# EAGLE board 13725_Qwiic_Spectral_Sensor-AS726x-panel.v10 (EAGLE 7.1.0), part 1 of 6
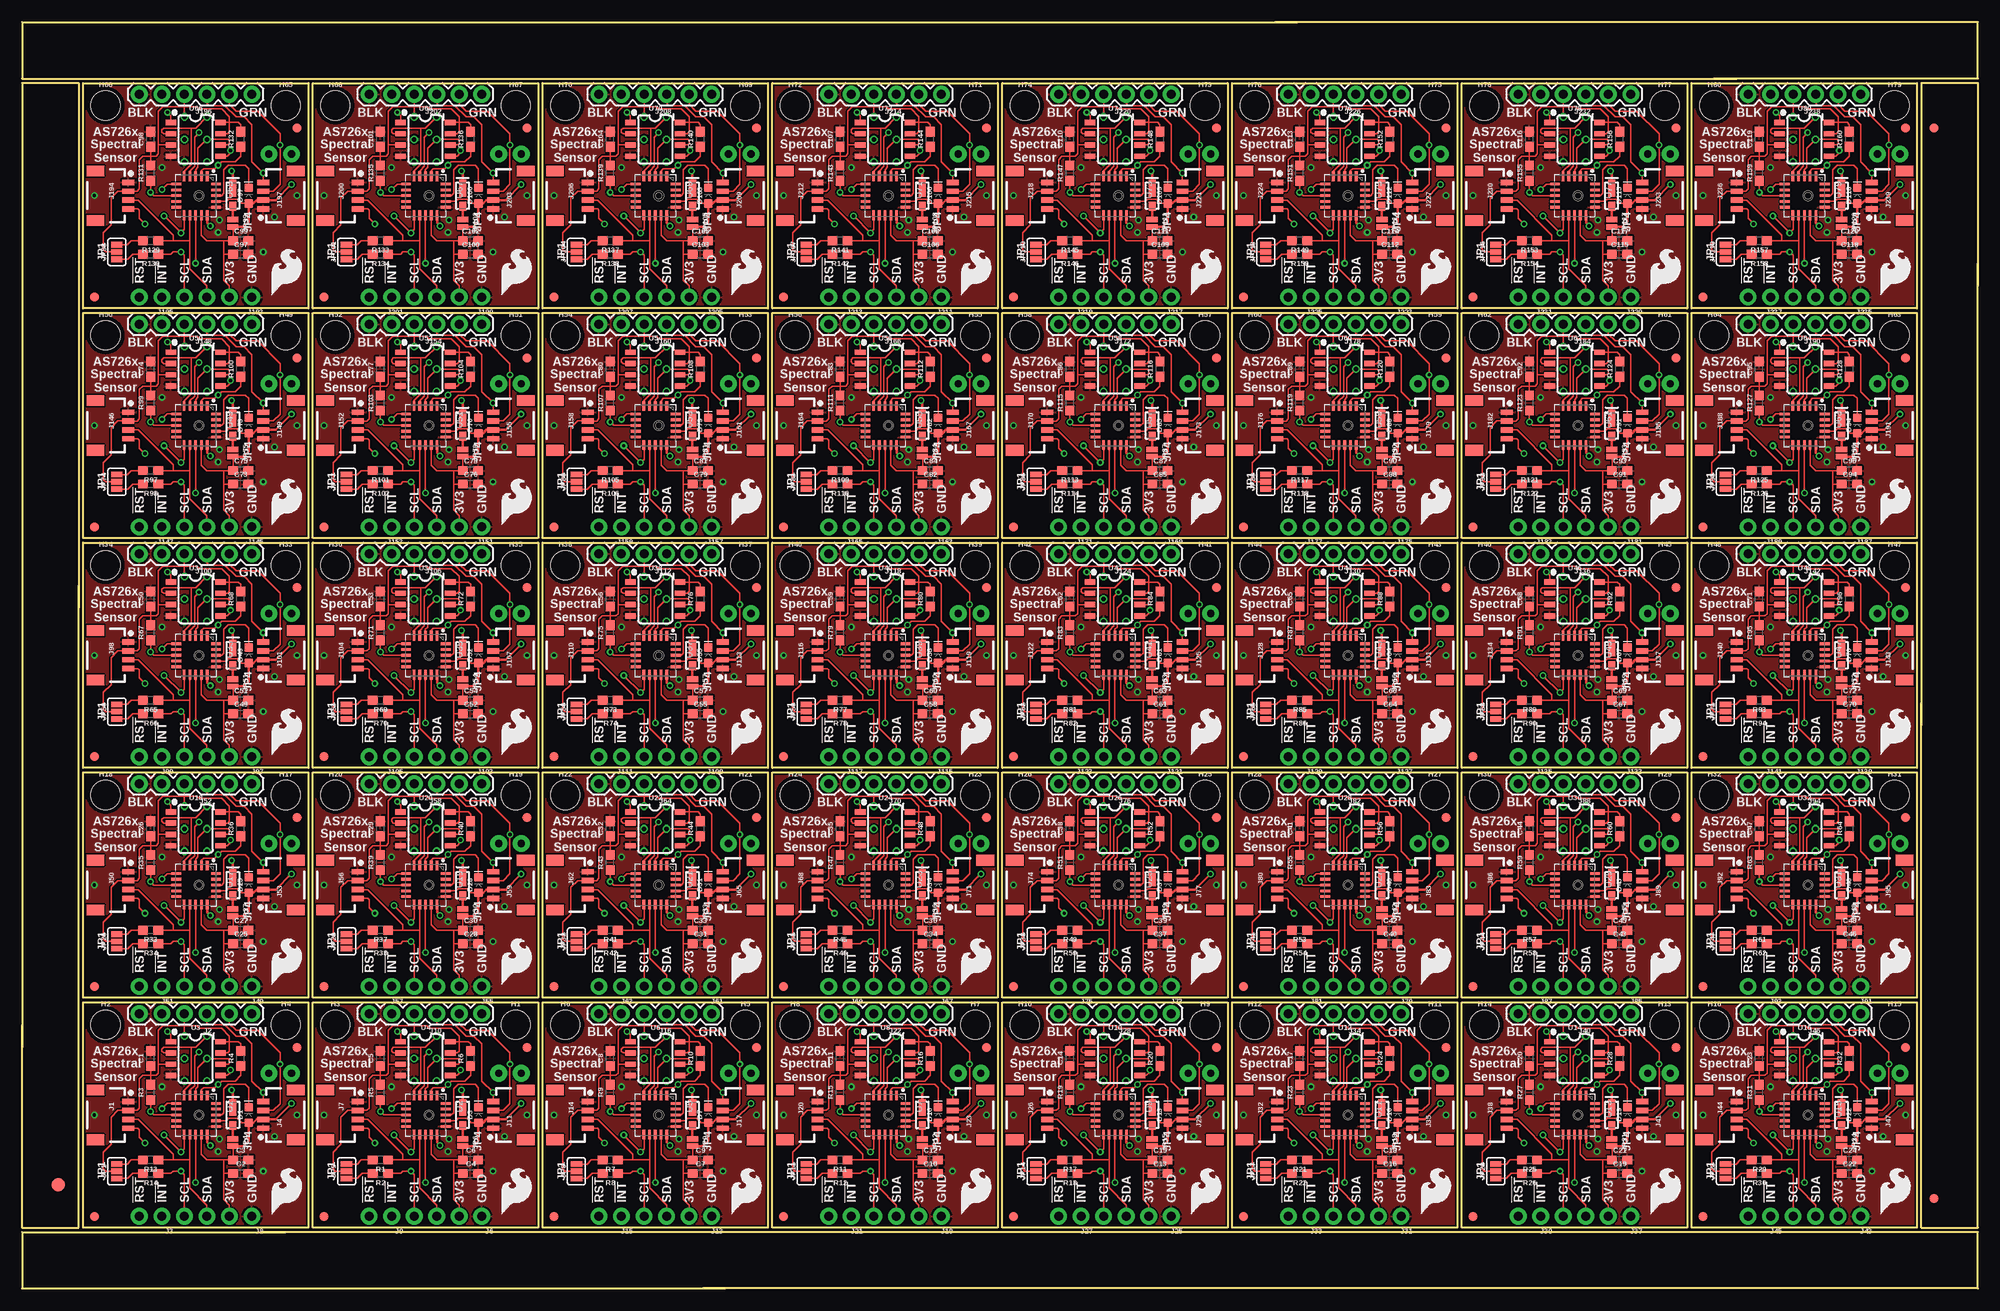
[diagram p0: board, top side]
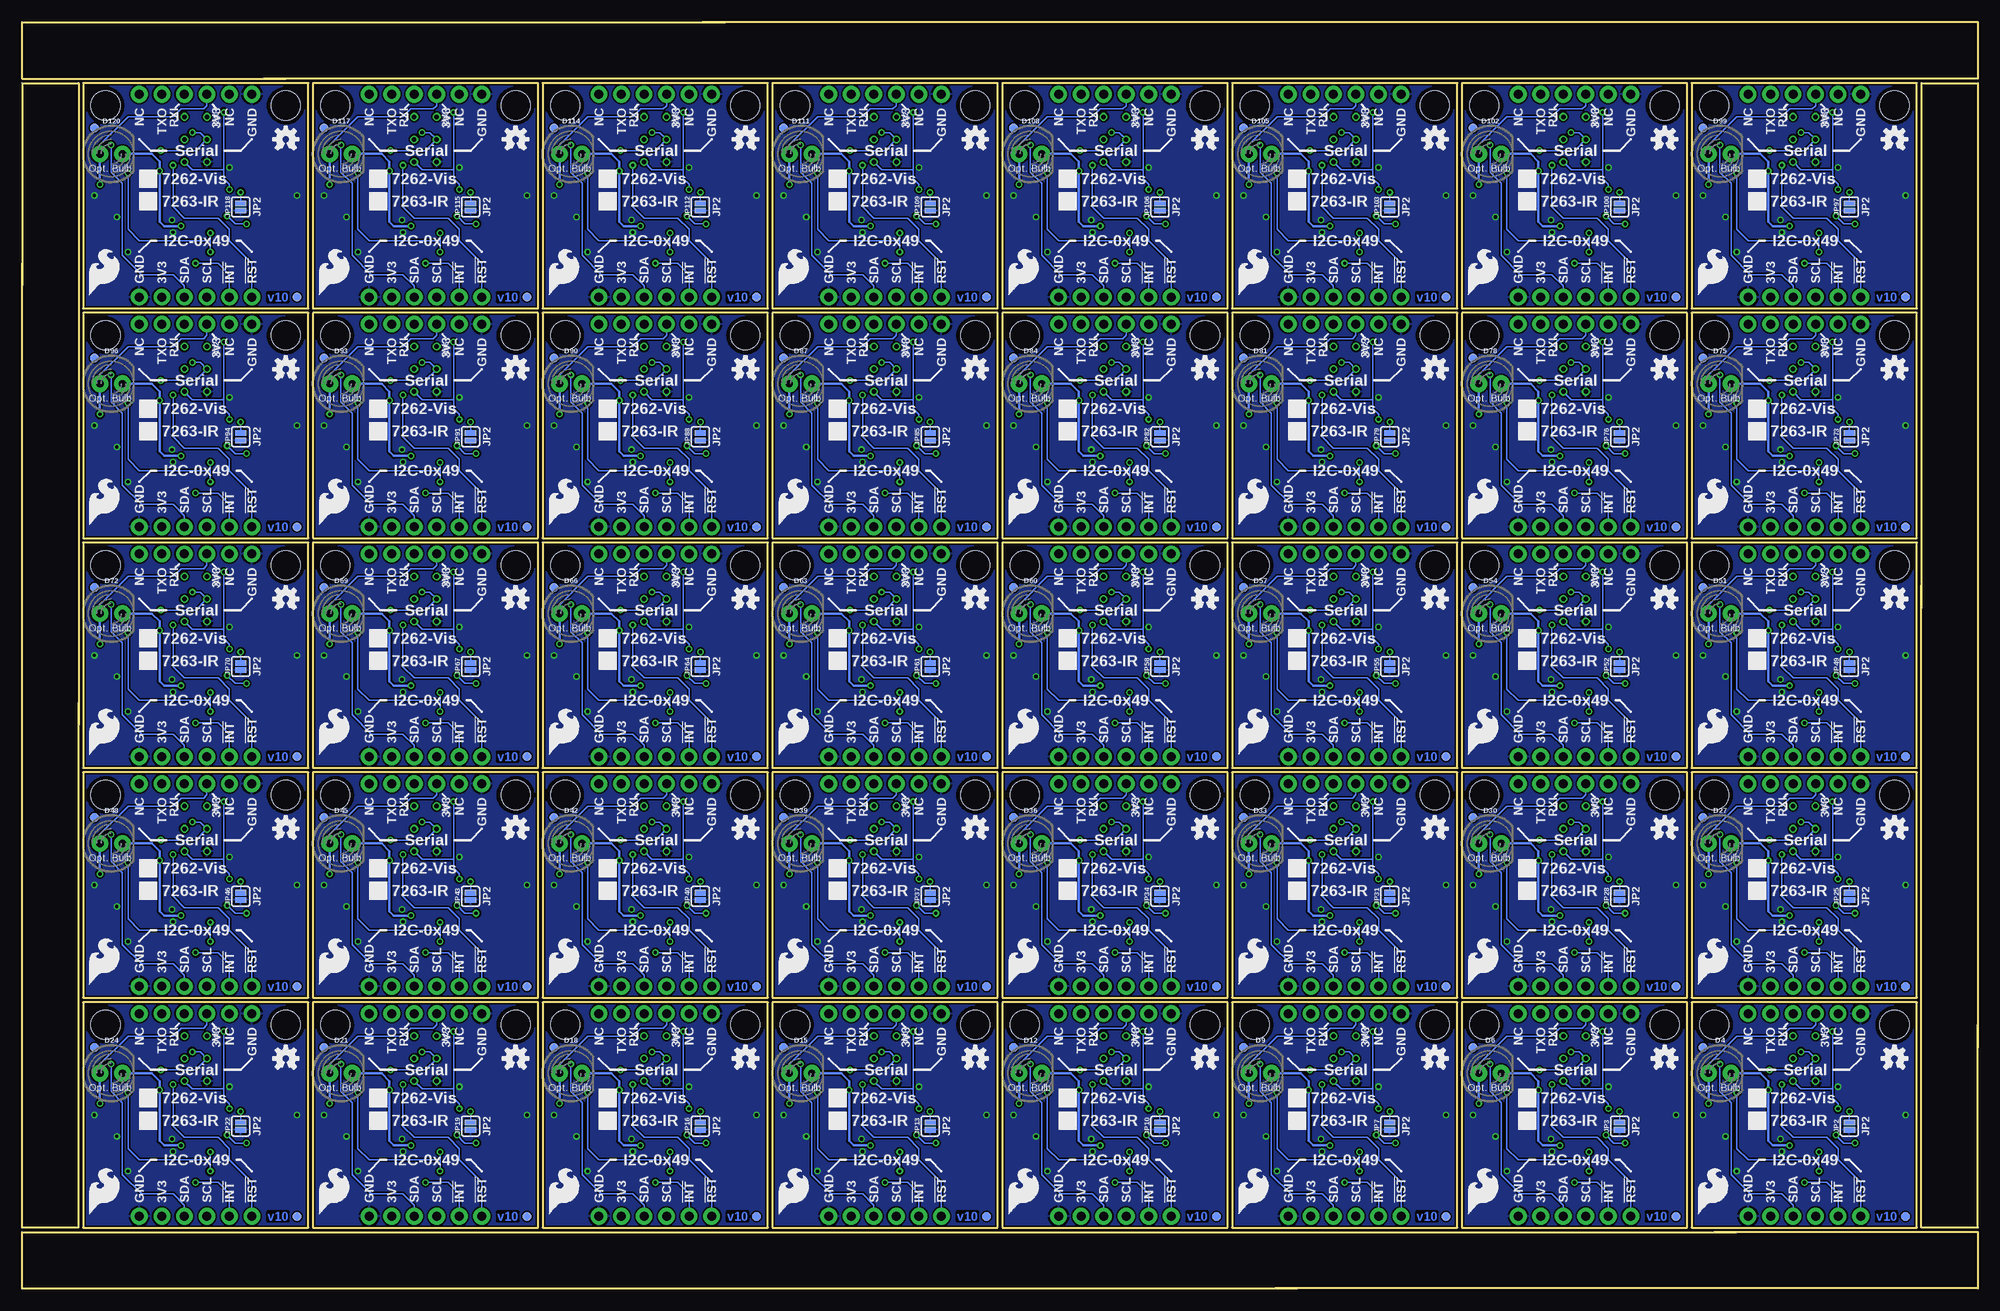
[diagram p1: board, bottom side, seen from below]

Size 220.47 x 142.75 mm. Coordinates in mm from the lower left corner, seen from the top.
Outline: 184 segments
Copper layers (1*16): Top 0.035mm / dielectric 1.5mm / Bottom 0.035mm
Design rules "SparkFun-2-layer-TIGHT": minimum track width 7mil, minimum drill 15mil, track to track 7mil, track to pad 7mil, pad to pad 7mil, via to via 7mil, smd to smd 7mil, copper to edge 7mil, drill to drill 7mil, minimum pad ring 7mil, minimum via ring 7mil, stop-mask expansion 4mil, vias tented up to drill 25mil, thermal gap 10mil

## Footprints (pad centres in the part's own frame; a part is rotated, then mirrored left to right if it is on the bottom)
0603 = smd 1.1 x 1: 1 -0.85,0; 2 0.85,0
LED-0603 = smd 1 x 1: A -0.877,0; C 0.877,0
SUPER_BRIGHT_SMD_LED_3014 = smd 1 x 0.8: A -1.2,0 | smd 1.9 x 0.8: C 0.827,0
LED_5MM_NOSILK = drill 0.813 pad 1.88: A -1.27,0; K 1.27,0
FIDUCIAL-1.5X3 = smd 1.5 x 1.5: 1 0,0
FIDUCIAL-1X2 = smd 1 x 1: 1 0,0
STAND-OFF = hole 3.302: 0,0
1X04_1MM_RA = smd 0.6 x 1.35: 1 -1.5,0; 2 -0.5,0; 3 0.5,0; 4 1.5,0 | smd 1.2 x 2: NC1 2.8,-3.675; NC2 -2.8,-3.675
FTDI_BASIC = drill 1.016 pad 1.88: CTS 10.16,0; DTR 0,0; GND 12.7,0; RXI 2.54,0; TXO 5.08,0; VCC 7.62,0
1X02_NO_SILK = drill 1.016 pad 1.88: 1 0,0; 2 2.54,0
2X3_TEST_POINTS = drill 0.508: 1 -2.54,-1.27; 2 -2.54,1.27; 3 0,-1.27; 4 0,1.27; 5 2.54,-1.27; 6 2.54,1.27
1X04_NO_SILK = drill 1.016 pad 1.88: 1 0,0; 2 2.54,0; 3 5.08,0; 4 7.62,0
SMT-JUMPER_3_2-NC_PASTE_SILK = smd 0.635 x 1.27: 1 -0.813,0; 2 0,0; 3 0.813,0
SMT-JUMPER_2_NO_SILK = smd 0.635 x 1.27: 1 -0.406,0; 2 0.406,0
SMT-JUMPER_2_NC_PASTE_NO-SILK = smd 0.635 x 1.27: 1 -0.406,0; 2 0.406,0
LGA20 = smd 1.1 x 0.3: 1 -2.2,1.3; 2 -2.2,0.65; 3 -2.2,0; 4 -2.2,-0.65; 5 -2.2,-1.3; 11 2.2,-1.3; 12 2.2,-0.65; 13 2.2,0; 14 2.2,0.65; 15 2.2,1.3 | smd 0.3 x 1.1: 6 -1.3,-2.2; 7 -0.65,-2.2; 8 0,-2.2; 9 0.65,-2.2; 10 1.3,-2.2; 16 1.3,2.3; 17 0.65,2.3; 18 0,2.3; 19 -0.65,2.3; 20 -1.3,2.3
SO08 = smd 0.6 x 1.2: 1 -1.905,-2.8; 2 -0.635,-2.8; 3 0.635,-2.8; 4 1.905,-2.8; 5 1.905,2.8; 6 0.635,2.8; 7 -0.635,2.8; 8 -1.905,2.8

## Placement (x,y rotation side)
C1  1.0uF  [0603]  14.48,25.91 90 top
C2  1.0uF  [0603]  24.64,12.95 0 top
C3  10uF  [0603]  24.64,14.48 0 top
C4  1.0uF  [0603]  50.55,12.95 0 top
C5  1.0uF  [0603]  40.39,25.91 90 top
C6  10uF  [0603]  50.55,14.48 0 top
C7  1.0uF  [0603]  76.45,12.95 0 top
C8  1.0uF  [0603]  66.29,25.91 90 top
C9  10uF  [0603]  76.45,14.48 0 top
C10  1.0uF  [0603]  102.36,12.95 0 top
C11  1.0uF  [0603]  92.2,25.91 90 top
C12  10uF  [0603]  102.36,14.48 0 top
C13  1.0uF  [0603]  128.27,12.95 0 top
C14  1.0uF  [0603]  118.11,25.91 90 top
C15  10uF  [0603]  128.27,14.48 0 top
C16  1.0uF  [0603]  154.18,12.95 0 top
C17  1.0uF  [0603]  144.02,25.91 90 top
C18  10uF  [0603]  154.18,14.48 0 top
C19  1.0uF  [0603]  180.09,12.95 0 top
C20  1.0uF  [0603]  169.93,25.91 90 top
C21  10uF  [0603]  180.09,14.48 0 top
C22  1.0uF  [0603]  205.99,12.95 0 top
C23  1.0uF  [0603]  195.83,25.91 90 top
C24  10uF  [0603]  205.99,14.48 0 top
C25  1.0uF  [0603]  24.64,38.86 0 top
C26  1.0uF  [0603]  14.48,51.82 90 top
C27  10uF  [0603]  24.64,40.39 0 top
C28  1.0uF  [0603]  50.55,38.86 0 top
C29  1.0uF  [0603]  40.39,51.82 90 top
C30  10uF  [0603]  50.55,40.39 0 top
C31  1.0uF  [0603]  76.45,38.86 0 top
C32  1.0uF  [0603]  66.29,51.82 90 top
C33  10uF  [0603]  76.45,40.39 0 top
C34  1.0uF  [0603]  102.36,38.86 0 top
C35  1.0uF  [0603]  92.2,51.82 90 top
C36  10uF  [0603]  102.36,40.39 0 top
C37  1.0uF  [0603]  128.27,38.86 0 top
C38  1.0uF  [0603]  118.11,51.82 90 top
C39  10uF  [0603]  128.27,40.39 0 top
C40  1.0uF  [0603]  154.18,38.86 0 top
C41  1.0uF  [0603]  144.02,51.82 90 top
C42  10uF  [0603]  154.18,40.39 0 top
C43  1.0uF  [0603]  180.09,38.86 0 top
C44  1.0uF  [0603]  169.93,51.82 90 top
C45  10uF  [0603]  180.09,40.39 0 top
C46  1.0uF  [0603]  205.99,38.86 0 top
C47  1.0uF  [0603]  195.83,51.82 90 top
C48  10uF  [0603]  205.99,40.39 0 top
C49  1.0uF  [0603]  24.64,64.77 0 top
C50  1.0uF  [0603]  14.48,77.72 90 top
C51  10uF  [0603]  24.64,66.29 0 top
C52  1.0uF  [0603]  50.55,64.77 0 top
C53  1.0uF  [0603]  40.39,77.72 90 top
C54  10uF  [0603]  50.55,66.29 0 top
C55  1.0uF  [0603]  76.45,64.77 0 top
C56  1.0uF  [0603]  66.29,77.72 90 top
C57  10uF  [0603]  76.45,66.29 0 top
C58  1.0uF  [0603]  102.36,64.77 0 top
C59  1.0uF  [0603]  92.2,77.72 90 top
C60  10uF  [0603]  102.36,66.29 0 top
C61  1.0uF  [0603]  128.27,64.77 0 top
C62  1.0uF  [0603]  118.11,77.72 90 top
C63  10uF  [0603]  128.27,66.29 0 top
C64  1.0uF  [0603]  154.18,64.77 0 top
C65  1.0uF  [0603]  144.02,77.72 90 top
C66  10uF  [0603]  154.18,66.29 0 top
C67  1.0uF  [0603]  180.09,64.77 0 top
C68  1.0uF  [0603]  169.93,77.72 90 top
C69  10uF  [0603]  180.09,66.29 0 top
C70  1.0uF  [0603]  205.99,64.77 0 top
C71  1.0uF  [0603]  195.83,77.72 90 top
C72  10uF  [0603]  205.99,66.29 0 top
C73  1.0uF  [0603]  24.64,90.68 0 top
C74  1.0uF  [0603]  14.48,103.63 90 top
C75  10uF  [0603]  24.64,92.2 0 top
C76  1.0uF  [0603]  50.55,90.68 0 top
C77  1.0uF  [0603]  40.39,103.63 90 top
C78  10uF  [0603]  50.55,92.2 0 top
C79  1.0uF  [0603]  76.45,90.68 0 top
C80  1.0uF  [0603]  66.29,103.63 90 top
C81  10uF  [0603]  76.45,92.2 0 top
C82  1.0uF  [0603]  102.36,90.68 0 top
C83  1.0uF  [0603]  92.2,103.63 90 top
C84  10uF  [0603]  102.36,92.2 0 top
C85  1.0uF  [0603]  128.27,90.68 0 top
C86  1.0uF  [0603]  118.11,103.63 90 top
C87  10uF  [0603]  128.27,92.2 0 top
C88  1.0uF  [0603]  154.18,90.68 0 top
C89  1.0uF  [0603]  144.02,103.63 90 top
C90  10uF  [0603]  154.18,92.2 0 top
C91  1.0uF  [0603]  180.09,90.68 0 top
C92  1.0uF  [0603]  169.93,103.63 90 top
C93  10uF  [0603]  180.09,92.2 0 top
C94  1.0uF  [0603]  205.99,90.68 0 top
C95  1.0uF  [0603]  195.83,103.63 90 top
C96  10uF  [0603]  205.99,92.2 0 top
C97  1.0uF  [0603]  24.64,116.59 0 top
C98  1.0uF  [0603]  14.48,129.54 90 top
C99  10uF  [0603]  24.64,118.11 0 top
C100  1.0uF  [0603]  50.55,116.59 0 top
C101  1.0uF  [0603]  40.39,129.54 90 top
C102  10uF  [0603]  50.55,118.11 0 top
C103  1.0uF  [0603]  76.45,116.59 0 top
C104  1.0uF  [0603]  66.29,129.54 90 top
C105  10uF  [0603]  76.45,118.11 0 top
C106  1.0uF  [0603]  102.36,116.59 0 top
C107  1.0uF  [0603]  92.2,129.54 90 top
C108  10uF  [0603]  102.36,118.11 0 top
C109  1.0uF  [0603]  128.27,116.59 0 top
C110  1.0uF  [0603]  118.11,129.54 90 top
C111  10uF  [0603]  128.27,118.11 0 top
C112  1.0uF  [0603]  154.18,116.59 0 top
C113  1.0uF  [0603]  144.02,129.54 90 top
C114  10uF  [0603]  154.18,118.11 0 top
C115  1.0uF  [0603]  180.09,116.59 0 top
C116  1.0uF  [0603]  169.93,129.54 90 top
C117  10uF  [0603]  180.09,118.11 0 top
C118  1.0uF  [0603]  205.99,116.59 0 top
C119  1.0uF  [0603]  195.83,129.54 90 top
C120  10uF  [0603]  205.99,118.11 0 top
D1  BLUE  [LED-0603]  25.53,19.56 90 top
D2  White, 60mA  [SUPER_BRIGHT_SMD_LED_3014]  23.75,19.56 90 top
D3  BLUE  [LED-0603]  51.44,19.56 90 top
D4  Incandescent  [LED_5MM_NOSILK]  29.08,24.26 0 bottom
D5  White, 60mA  [SUPER_BRIGHT_SMD_LED_3014]  49.66,19.56 90 top
D6  Incandescent  [LED_5MM_NOSILK]  54.99,24.26 0 bottom
D7  BLUE  [LED-0603]  77.34,19.56 90 top
D8  White, 60mA  [SUPER_BRIGHT_SMD_LED_3014]  75.56,19.56 90 top
D9  Incandescent  [LED_5MM_NOSILK]  80.9,24.26 0 bottom
D10  BLUE  [LED-0603]  103.25,19.56 90 top
D11  White, 60mA  [SUPER_BRIGHT_SMD_LED_3014]  101.47,19.56 90 top
D12  Incandescent  [LED_5MM_NOSILK]  106.81,24.26 0 bottom
D13  BLUE  [LED-0603]  129.16,19.56 90 top
D14  White, 60mA  [SUPER_BRIGHT_SMD_LED_3014]  127.38,19.56 90 top
D15  Incandescent  [LED_5MM_NOSILK]  132.72,24.26 0 bottom
D16  BLUE  [LED-0603]  155.07,19.56 90 top
D17  White, 60mA  [SUPER_BRIGHT_SMD_LED_3014]  153.29,19.56 90 top
D18  Incandescent  [LED_5MM_NOSILK]  158.62,24.26 0 bottom
D19  BLUE  [LED-0603]  180.97,19.56 90 top
D20  White, 60mA  [SUPER_BRIGHT_SMD_LED_3014]  179.2,19.56 90 top
D21  Incandescent  [LED_5MM_NOSILK]  184.53,24.26 0 bottom
D22  BLUE  [LED-0603]  206.88,19.56 90 top
D23  White, 60mA  [SUPER_BRIGHT_SMD_LED_3014]  205.1,19.56 90 top
D24  Incandescent  [LED_5MM_NOSILK]  210.44,24.26 0 bottom
D25  BLUE  [LED-0603]  25.53,45.47 90 top
D26  White, 60mA  [SUPER_BRIGHT_SMD_LED_3014]  23.75,45.47 90 top
D27  Incandescent  [LED_5MM_NOSILK]  29.08,50.16 0 bottom
D28  BLUE  [LED-0603]  51.44,45.47 90 top
D29  White, 60mA  [SUPER_BRIGHT_SMD_LED_3014]  49.66,45.47 90 top
D30  Incandescent  [LED_5MM_NOSILK]  54.99,50.16 0 bottom
D31  BLUE  [LED-0603]  77.34,45.47 90 top
D32  White, 60mA  [SUPER_BRIGHT_SMD_LED_3014]  75.56,45.47 90 top
D33  Incandescent  [LED_5MM_NOSILK]  80.9,50.16 0 bottom
D34  BLUE  [LED-0603]  103.25,45.47 90 top
D35  White, 60mA  [SUPER_BRIGHT_SMD_LED_3014]  101.47,45.47 90 top
D36  Incandescent  [LED_5MM_NOSILK]  106.81,50.16 0 bottom
D37  BLUE  [LED-0603]  129.16,45.47 90 top
D38  White, 60mA  [SUPER_BRIGHT_SMD_LED_3014]  127.38,45.47 90 top
D39  Incandescent  [LED_5MM_NOSILK]  132.72,50.16 0 bottom
D40  BLUE  [LED-0603]  155.07,45.47 90 top
D41  White, 60mA  [SUPER_BRIGHT_SMD_LED_3014]  153.29,45.47 90 top
D42  Incandescent  [LED_5MM_NOSILK]  158.62,50.16 0 bottom
D43  BLUE  [LED-0603]  180.97,45.47 90 top
D44  White, 60mA  [SUPER_BRIGHT_SMD_LED_3014]  179.2,45.47 90 top
D45  Incandescent  [LED_5MM_NOSILK]  184.53,50.16 0 bottom
D46  BLUE  [LED-0603]  206.88,45.47 90 top
D47  White, 60mA  [SUPER_BRIGHT_SMD_LED_3014]  205.1,45.47 90 top
D48  Incandescent  [LED_5MM_NOSILK]  210.44,50.16 0 bottom
D49  BLUE  [LED-0603]  25.53,71.37 90 top
D50  White, 60mA  [SUPER_BRIGHT_SMD_LED_3014]  23.75,71.37 90 top
D51  Incandescent  [LED_5MM_NOSILK]  29.08,76.07 0 bottom
D52  BLUE  [LED-0603]  51.44,71.37 90 top
D53  White, 60mA  [SUPER_BRIGHT_SMD_LED_3014]  49.66,71.37 90 top
D54  Incandescent  [LED_5MM_NOSILK]  54.99,76.07 0 bottom
D55  BLUE  [LED-0603]  77.34,71.37 90 top
D56  White, 60mA  [SUPER_BRIGHT_SMD_LED_3014]  75.56,71.37 90 top
D57  Incandescent  [LED_5MM_NOSILK]  80.9,76.07 0 bottom
D58  BLUE  [LED-0603]  103.25,71.37 90 top
D59  White, 60mA  [SUPER_BRIGHT_SMD_LED_3014]  101.47,71.37 90 top
D60  Incandescent  [LED_5MM_NOSILK]  106.81,76.07 0 bottom
D61  BLUE  [LED-0603]  129.16,71.37 90 top
D62  White, 60mA  [SUPER_BRIGHT_SMD_LED_3014]  127.38,71.37 90 top
D63  Incandescent  [LED_5MM_NOSILK]  132.72,76.07 0 bottom
D64  BLUE  [LED-0603]  155.07,71.37 90 top
D65  White, 60mA  [SUPER_BRIGHT_SMD_LED_3014]  153.29,71.37 90 top
D66  Incandescent  [LED_5MM_NOSILK]  158.62,76.07 0 bottom
D67  BLUE  [LED-0603]  180.97,71.37 90 top
D68  White, 60mA  [SUPER_BRIGHT_SMD_LED_3014]  179.2,71.37 90 top
D69  Incandescent  [LED_5MM_NOSILK]  184.53,76.07 0 bottom
D70  BLUE  [LED-0603]  206.88,71.37 90 top
D71  White, 60mA  [SUPER_BRIGHT_SMD_LED_3014]  205.1,71.37 90 top
D72  Incandescent  [LED_5MM_NOSILK]  210.44,76.07 0 bottom
D73  BLUE  [LED-0603]  25.53,97.28 90 top
D74  White, 60mA  [SUPER_BRIGHT_SMD_LED_3014]  23.75,97.28 90 top
D75  Incandescent  [LED_5MM_NOSILK]  29.08,101.98 0 bottom
D76  BLUE  [LED-0603]  51.44,97.28 90 top
D77  White, 60mA  [SUPER_BRIGHT_SMD_LED_3014]  49.66,97.28 90 top
D78  Incandescent  [LED_5MM_NOSILK]  54.99,101.98 0 bottom
D79  BLUE  [LED-0603]  77.34,97.28 90 top
D80  White, 60mA  [SUPER_BRIGHT_SMD_LED_3014]  75.56,97.28 90 top
D81  Incandescent  [LED_5MM_NOSILK]  80.9,101.98 0 bottom
D82  BLUE  [LED-0603]  103.25,97.28 90 top
D83  White, 60mA  [SUPER_BRIGHT_SMD_LED_3014]  101.47,97.28 90 top
D84  Incandescent  [LED_5MM_NOSILK]  106.81,101.98 0 bottom
D85  BLUE  [LED-0603]  129.16,97.28 90 top
D86  White, 60mA  [SUPER_BRIGHT_SMD_LED_3014]  127.38,97.28 90 top
D87  Incandescent  [LED_5MM_NOSILK]  132.72,101.98 0 bottom
D88  BLUE  [LED-0603]  155.07,97.28 90 top
D89  White, 60mA  [SUPER_BRIGHT_SMD_LED_3014]  153.29,97.28 90 top
D90  Incandescent  [LED_5MM_NOSILK]  158.62,101.98 0 bottom
D91  BLUE  [LED-0603]  180.97,97.28 90 top
D92  White, 60mA  [SUPER_BRIGHT_SMD_LED_3014]  179.2,97.28 90 top
D93  Incandescent  [LED_5MM_NOSILK]  184.53,101.98 0 bottom
D94  BLUE  [LED-0603]  206.88,97.28 90 top
D95  White, 60mA  [SUPER_BRIGHT_SMD_LED_3014]  205.1,97.28 90 top
D96  Incandescent  [LED_5MM_NOSILK]  210.44,101.98 0 bottom
D97  BLUE  [LED-0603]  25.53,123.19 90 top
D98  White, 60mA  [SUPER_BRIGHT_SMD_LED_3014]  23.75,123.19 90 top
D99  Incandescent  [LED_5MM_NOSILK]  29.08,127.89 0 bottom
D100  BLUE  [LED-0603]  51.44,123.19 90 top
D101  White, 60mA  [SUPER_BRIGHT_SMD_LED_3014]  49.66,123.19 90 top
D102  Incandescent  [LED_5MM_NOSILK]  54.99,127.89 0 bottom
D103  BLUE  [LED-0603]  77.34,123.19 90 top
D104  White, 60mA  [SUPER_BRIGHT_SMD_LED_3014]  75.56,123.19 90 top
D105  Incandescent  [LED_5MM_NOSILK]  80.9,127.89 0 bottom
D106  BLUE  [LED-0603]  103.25,123.19 90 top
D107  White, 60mA  [SUPER_BRIGHT_SMD_LED_3014]  101.47,123.19 90 top
D108  Incandescent  [LED_5MM_NOSILK]  106.81,127.89 0 bottom
D109  BLUE  [LED-0603]  129.16,123.19 90 top
D110  White, 60mA  [SUPER_BRIGHT_SMD_LED_3014]  127.38,123.19 90 top
D111  Incandescent  [LED_5MM_NOSILK]  132.72,127.89 0 bottom
D112  BLUE  [LED-0603]  155.07,123.19 90 top
D113  White, 60mA  [SUPER_BRIGHT_SMD_LED_3014]  153.29,123.19 90 top
D114  Incandescent  [LED_5MM_NOSILK]  158.62,127.89 0 bottom
D115  BLUE  [LED-0603]  180.97,123.19 90 top
D116  White, 60mA  [SUPER_BRIGHT_SMD_LED_3014]  179.2,123.19 90 top
D117  Incandescent  [LED_5MM_NOSILK]  184.53,127.89 0 bottom
D118  BLUE  [LED-0603]  206.88,123.19 90 top
D119  White, 60mA  [SUPER_BRIGHT_SMD_LED_3014]  205.1,123.19 90 top
D120  Incandescent  [LED_5MM_NOSILK]  210.44,127.89 0 bottom
E$1  [FIDUCIAL-1.5X3]  4.06,11.68 0 top
E$7  [FIDUCIAL-1X2]  215.52,130.81 180 top
E$8  [FIDUCIAL-1X2]  215.52,10.16 0 top
FD1  FIDUCIAL1X2  [FIDUCIAL-1X2]  8.13,8.13 0 top
FD2  FIDUCIAL1X2  [FIDUCIAL-1X2]  30.99,27.18 0 top
FD3  FIDUCIAL1X2  [FIDUCIAL-1X2]  8.13,8.13 0 bottom
FD4  FIDUCIAL1X2  [FIDUCIAL-1X2]  30.99,27.18 0 bottom
FD5  FIDUCIAL1X2  [FIDUCIAL-1X2]  34.04,8.13 0 top
FD6  FIDUCIAL1X2  [FIDUCIAL-1X2]  56.9,27.18 0 top
FD7  FIDUCIAL1X2  [FIDUCIAL-1X2]  34.04,8.13 0 bottom
FD8  FIDUCIAL1X2  [FIDUCIAL-1X2]  56.9,27.18 0 bottom
FD9  FIDUCIAL1X2  [FIDUCIAL-1X2]  59.94,8.13 0 top
FD10  FIDUCIAL1X2  [FIDUCIAL-1X2]  82.8,27.18 0 top
FD11  FIDUCIAL1X2  [FIDUCIAL-1X2]  59.94,8.13 0 bottom
FD12  FIDUCIAL1X2  [FIDUCIAL-1X2]  82.8,27.18 0 bottom
FD13  FIDUCIAL1X2  [FIDUCIAL-1X2]  85.85,8.13 0 top
FD14  FIDUCIAL1X2  [FIDUCIAL-1X2]  108.71,27.18 0 top
FD15  FIDUCIAL1X2  [FIDUCIAL-1X2]  85.85,8.13 0 bottom
FD16  FIDUCIAL1X2  [FIDUCIAL-1X2]  108.71,27.18 0 bottom
FD17  FIDUCIAL1X2  [FIDUCIAL-1X2]  111.76,8.13 0 top
FD18  FIDUCIAL1X2  [FIDUCIAL-1X2]  134.62,27.18 0 top
FD19  FIDUCIAL1X2  [FIDUCIAL-1X2]  111.76,8.13 0 bottom
FD20  FIDUCIAL1X2  [FIDUCIAL-1X2]  134.62,27.18 0 bottom
FD21  FIDUCIAL1X2  [FIDUCIAL-1X2]  137.67,8.13 0 top
FD22  FIDUCIAL1X2  [FIDUCIAL-1X2]  160.53,27.18 0 top
FD23  FIDUCIAL1X2  [FIDUCIAL-1X2]  137.67,8.13 0 bottom
FD24  FIDUCIAL1X2  [FIDUCIAL-1X2]  160.53,27.18 0 bottom
FD25  FIDUCIAL1X2  [FIDUCIAL-1X2]  163.58,8.13 0 top
FD26  FIDUCIAL1X2  [FIDUCIAL-1X2]  186.44,27.18 0 top
FD27  FIDUCIAL1X2  [FIDUCIAL-1X2]  163.58,8.13 0 bottom
FD28  FIDUCIAL1X2  [FIDUCIAL-1X2]  186.44,27.18 0 bottom
FD29  FIDUCIAL1X2  [FIDUCIAL-1X2]  189.48,8.13 0 top
FD30  FIDUCIAL1X2  [FIDUCIAL-1X2]  212.34,27.18 0 top
FD31  FIDUCIAL1X2  [FIDUCIAL-1X2]  189.48,8.13 0 bottom
FD32  FIDUCIAL1X2  [FIDUCIAL-1X2]  212.34,27.18 0 bottom
FD33  FIDUCIAL1X2  [FIDUCIAL-1X2]  8.13,34.04 0 top
FD34  FIDUCIAL1X2  [FIDUCIAL-1X2]  30.99,53.09 0 top
FD35  FIDUCIAL1X2  [FIDUCIAL-1X2]  8.13,34.04 0 bottom
FD36  FIDUCIAL1X2  [FIDUCIAL-1X2]  30.99,53.09 0 bottom
FD37  FIDUCIAL1X2  [FIDUCIAL-1X2]  34.04,34.04 0 top
FD38  FIDUCIAL1X2  [FIDUCIAL-1X2]  56.9,53.09 0 top
FD39  FIDUCIAL1X2  [FIDUCIAL-1X2]  34.04,34.04 0 bottom
FD40  FIDUCIAL1X2  [FIDUCIAL-1X2]  56.9,53.09 0 bottom
FD41  FIDUCIAL1X2  [FIDUCIAL-1X2]  59.94,34.04 0 top
FD42  FIDUCIAL1X2  [FIDUCIAL-1X2]  82.8,53.09 0 top
FD43  FIDUCIAL1X2  [FIDUCIAL-1X2]  59.94,34.04 0 bottom
FD44  FIDUCIAL1X2  [FIDUCIAL-1X2]  82.8,53.09 0 bottom
FD45  FIDUCIAL1X2  [FIDUCIAL-1X2]  85.85,34.04 0 top
FD46  FIDUCIAL1X2  [FIDUCIAL-1X2]  108.71,53.09 0 top
FD47  FIDUCIAL1X2  [FIDUCIAL-1X2]  85.85,34.04 0 bottom
FD48  FIDUCIAL1X2  [FIDUCIAL-1X2]  108.71,53.09 0 bottom
FD49  FIDUCIAL1X2  [FIDUCIAL-1X2]  111.76,34.04 0 top
FD50  FIDUCIAL1X2  [FIDUCIAL-1X2]  134.62,53.09 0 top
FD51  FIDUCIAL1X2  [FIDUCIAL-1X2]  111.76,34.04 0 bottom
FD52  FIDUCIAL1X2  [FIDUCIAL-1X2]  134.62,53.09 0 bottom
FD53  FIDUCIAL1X2  [FIDUCIAL-1X2]  137.67,34.04 0 top
FD54  FIDUCIAL1X2  [FIDUCIAL-1X2]  160.53,53.09 0 top
FD55  FIDUCIAL1X2  [FIDUCIAL-1X2]  137.67,34.04 0 bottom
FD56  FIDUCIAL1X2  [FIDUCIAL-1X2]  160.53,53.09 0 bottom
FD57  FIDUCIAL1X2  [FIDUCIAL-1X2]  163.58,34.04 0 top
FD58  FIDUCIAL1X2  [FIDUCIAL-1X2]  186.44,53.09 0 top
FD59  FIDUCIAL1X2  [FIDUCIAL-1X2]  163.58,34.04 0 bottom
FD60  FIDUCIAL1X2  [FIDUCIAL-1X2]  186.44,53.09 0 bottom
FD61  FIDUCIAL1X2  [FIDUCIAL-1X2]  189.48,34.04 0 top
FD62  FIDUCIAL1X2  [FIDUCIAL-1X2]  212.34,53.09 0 top
FD63  FIDUCIAL1X2  [FIDUCIAL-1X2]  189.48,34.04 0 bottom
FD64  FIDUCIAL1X2  [FIDUCIAL-1X2]  212.34,53.09 0 bottom
FD65  FIDUCIAL1X2  [FIDUCIAL-1X2]  8.13,59.94 0 top
FD66  FIDUCIAL1X2  [FIDUCIAL-1X2]  30.99,78.99 0 top
FD67  FIDUCIAL1X2  [FIDUCIAL-1X2]  8.13,59.94 0 bottom
FD68  FIDUCIAL1X2  [FIDUCIAL-1X2]  30.99,78.99 0 bottom
FD69  FIDUCIAL1X2  [FIDUCIAL-1X2]  34.04,59.94 0 top
FD70  FIDUCIAL1X2  [FIDUCIAL-1X2]  56.9,78.99 0 top
FD71  FIDUCIAL1X2  [FIDUCIAL-1X2]  34.04,59.94 0 bottom
FD72  FIDUCIAL1X2  [FIDUCIAL-1X2]  56.9,78.99 0 bottom
FD73  FIDUCIAL1X2  [FIDUCIAL-1X2]  59.94,59.94 0 top
FD74  FIDUCIAL1X2  [FIDUCIAL-1X2]  82.8,78.99 0 top
FD75  FIDUCIAL1X2  [FIDUCIAL-1X2]  59.94,59.94 0 bottom
FD76  FIDUCIAL1X2  [FIDUCIAL-1X2]  82.8,78.99 0 bottom
FD77  FIDUCIAL1X2  [FIDUCIAL-1X2]  85.85,59.94 0 top
FD78  FIDUCIAL1X2  [FIDUCIAL-1X2]  108.71,78.99 0 top
FD79  FIDUCIAL1X2  [FIDUCIAL-1X2]  85.85,59.94 0 bottom
FD80  FIDUCIAL1X2  [FIDUCIAL-1X2]  108.71,78.99 0 bottom
FD81  FIDUCIAL1X2  [FIDUCIAL-1X2]  111.76,59.94 0 top
FD82  FIDUCIAL1X2  [FIDUCIAL-1X2]  134.62,78.99 0 top
FD83  FIDUCIAL1X2  [FIDUCIAL-1X2]  111.76,59.94 0 bottom
FD84  FIDUCIAL1X2  [FIDUCIAL-1X2]  134.62,78.99 0 bottom
FD85  FIDUCIAL1X2  [FIDUCIAL-1X2]  137.67,59.94 0 top
FD86  FIDUCIAL1X2  [FIDUCIAL-1X2]  160.53,78.99 0 top
FD87  FIDUCIAL1X2  [FIDUCIAL-1X2]  137.67,59.94 0 bottom
FD88  FIDUCIAL1X2  [FIDUCIAL-1X2]  160.53,78.99 0 bottom
FD89  FIDUCIAL1X2  [FIDUCIAL-1X2]  163.58,59.94 0 top
FD90  FIDUCIAL1X2  [FIDUCIAL-1X2]  186.44,78.99 0 top
FD91  FIDUCIAL1X2  [FIDUCIAL-1X2]  163.58,59.94 0 bottom
FD92  FIDUCIAL1X2  [FIDUCIAL-1X2]  186.44,78.99 0 bottom
FD93  FIDUCIAL1X2  [FIDUCIAL-1X2]  189.48,59.94 0 top
FD94  FIDUCIAL1X2  [FIDUCIAL-1X2]  212.34,78.99 0 top
FD95  FIDUCIAL1X2  [FIDUCIAL-1X2]  189.48,59.94 0 bottom
FD96  FIDUCIAL1X2  [FIDUCIAL-1X2]  212.34,78.99 0 bottom
FD97  FIDUCIAL1X2  [FIDUCIAL-1X2]  8.13,85.85 0 top
FD98  FIDUCIAL1X2  [FIDUCIAL-1X2]  30.99,104.9 0 top
FD99  FIDUCIAL1X2  [FIDUCIAL-1X2]  8.13,85.85 0 bottom
FD100  FIDUCIAL1X2  [FIDUCIAL-1X2]  30.99,104.9 0 bottom
FD101  FIDUCIAL1X2  [FIDUCIAL-1X2]  34.04,85.85 0 top
FD102  FIDUCIAL1X2  [FIDUCIAL-1X2]  56.9,104.9 0 top
FD103  FIDUCIAL1X2  [FIDUCIAL-1X2]  34.04,85.85 0 bottom
FD104  FIDUCIAL1X2  [FIDUCIAL-1X2]  56.9,104.9 0 bottom
FD105  FIDUCIAL1X2  [FIDUCIAL-1X2]  59.94,85.85 0 top
FD106  FIDUCIAL1X2  [FIDUCIAL-1X2]  82.8,104.9 0 top
FD107  FIDUCIAL1X2  [FIDUCIAL-1X2]  59.94,85.85 0 bottom
FD108  FIDUCIAL1X2  [FIDUCIAL-1X2]  82.8,104.9 0 bottom
FD109  FIDUCIAL1X2  [FIDUCIAL-1X2]  85.85,85.85 0 top
FD110  FIDUCIAL1X2  [FIDUCIAL-1X2]  108.71,104.9 0 top
FD111  FIDUCIAL1X2  [FIDUCIAL-1X2]  85.85,85.85 0 bottom
FD112  FIDUCIAL1X2  [FIDUCIAL-1X2]  108.71,104.9 0 bottom
FD113  FIDUCIAL1X2  [FIDUCIAL-1X2]  111.76,85.85 0 top
FD114  FIDUCIAL1X2  [FIDUCIAL-1X2]  134.62,104.9 0 top
FD115  FIDUCIAL1X2  [FIDUCIAL-1X2]  111.76,85.85 0 bottom
FD116  FIDUCIAL1X2  [FIDUCIAL-1X2]  134.62,104.9 0 bottom
FD117  FIDUCIAL1X2  [FIDUCIAL-1X2]  137.67,85.85 0 top
FD118  FIDUCIAL1X2  [FIDUCIAL-1X2]  160.53,104.9 0 top
FD119  FIDUCIAL1X2  [FIDUCIAL-1X2]  137.67,85.85 0 bottom
FD120  FIDUCIAL1X2  [FIDUCIAL-1X2]  160.53,104.9 0 bottom
FD121  FIDUCIAL1X2  [FIDUCIAL-1X2]  163.58,85.85 0 top
FD122  FIDUCIAL1X2  [FIDUCIAL-1X2]  186.44,104.9 0 top
FD123  FIDUCIAL1X2  [FIDUCIAL-1X2]  163.58,85.85 0 bottom
FD124  FIDUCIAL1X2  [FIDUCIAL-1X2]  186.44,104.9 0 bottom
FD125  FIDUCIAL1X2  [FIDUCIAL-1X2]  189.48,85.85 0 top
FD126  FIDUCIAL1X2  [FIDUCIAL-1X2]  212.34,104.9 0 top
FD127  FIDUCIAL1X2  [FIDUCIAL-1X2]  189.48,85.85 0 bottom
FD128  FIDUCIAL1X2  [FIDUCIAL-1X2]  212.34,104.9 0 bottom
FD129  FIDUCIAL1X2  [FIDUCIAL-1X2]  8.13,111.76 0 top
FD130  FIDUCIAL1X2  [FIDUCIAL-1X2]  30.99,130.81 0 top
FD131  FIDUCIAL1X2  [FIDUCIAL-1X2]  8.13,111.76 0 bottom
FD132  FIDUCIAL1X2  [FIDUCIAL-1X2]  30.99,130.81 0 bottom
FD133  FIDUCIAL1X2  [FIDUCIAL-1X2]  34.04,111.76 0 top
FD134  FIDUCIAL1X2  [FIDUCIAL-1X2]  56.9,130.81 0 top
FD135  FIDUCIAL1X2  [FIDUCIAL-1X2]  34.04,111.76 0 bottom
FD136  FIDUCIAL1X2  [FIDUCIAL-1X2]  56.9,130.81 0 bottom
FD137  FIDUCIAL1X2  [FIDUCIAL-1X2]  59.94,111.76 0 top
FD138  FIDUCIAL1X2  [FIDUCIAL-1X2]  82.8,130.81 0 top
FD139  FIDUCIAL1X2  [FIDUCIAL-1X2]  59.94,111.76 0 bottom
FD140  FIDUCIAL1X2  [FIDUCIAL-1X2]  82.8,130.81 0 bottom
FD141  FIDUCIAL1X2  [FIDUCIAL-1X2]  85.85,111.76 0 top
FD142  FIDUCIAL1X2  [FIDUCIAL-1X2]  108.71,130.81 0 top
FD143  FIDUCIAL1X2  [FIDUCIAL-1X2]  85.85,111.76 0 bottom
FD144  FIDUCIAL1X2  [FIDUCIAL-1X2]  108.71,130.81 0 bottom
FD145  FIDUCIAL1X2  [FIDUCIAL-1X2]  111.76,111.76 0 top
FD146  FIDUCIAL1X2  [FIDUCIAL-1X2]  134.62,130.81 0 top
FD147  FIDUCIAL1X2  [FIDUCIAL-1X2]  111.76,111.76 0 bottom
FD148  FIDUCIAL1X2  [FIDUCIAL-1X2]  134.62,130.81 0 bottom
FD149  FIDUCIAL1X2  [FIDUCIAL-1X2]  137.67,111.76 0 top
FD150  FIDUCIAL1X2  [FIDUCIAL-1X2]  160.53,130.81 0 top
FD151  FIDUCIAL1X2  [FIDUCIAL-1X2]  137.67,111.76 0 bottom
FD152  FIDUCIAL1X2  [FIDUCIAL-1X2]  160.53,130.81 0 bottom
FD153  FIDUCIAL1X2  [FIDUCIAL-1X2]  163.58,111.76 0 top
FD154  FIDUCIAL1X2  [FIDUCIAL-1X2]  186.44,130.81 0 top
FD155  FIDUCIAL1X2  [FIDUCIAL-1X2]  163.58,111.76 0 bottom
FD156  FIDUCIAL1X2  [FIDUCIAL-1X2]  186.44,130.81 0 bottom
FD157  FIDUCIAL1X2  [FIDUCIAL-1X2]  189.48,111.76 0 top
FD158  FIDUCIAL1X2  [FIDUCIAL-1X2]  212.34,130.81 0 top
FD159  FIDUCIAL1X2  [FIDUCIAL-1X2]  189.48,111.76 0 bottom
FD160  FIDUCIAL1X2  [FIDUCIAL-1X2]  212.34,130.81 0 bottom
H1  STAND-OFF  [STAND-OFF]  55.63,29.72 0 top
H2  STAND-OFF  [STAND-OFF]  9.4,29.72 0 top
H3  STAND-OFF  [STAND-OFF]  35.31,29.72 0 top
H4  STAND-OFF  [STAND-OFF]  29.72,29.72 0 top
H5  STAND-OFF  [STAND-OFF]  81.53,29.72 0 top
H6  STAND-OFF  [STAND-OFF]  61.21,29.72 0 top
H7  STAND-OFF  [STAND-OFF]  107.44,29.72 0 top
H8  STAND-OFF  [STAND-OFF]  87.12,29.72 0 top
H9  STAND-OFF  [STAND-OFF]  133.35,29.72 0 top
H10  STAND-OFF  [STAND-OFF]  113.03,29.72 0 top
H11  STAND-OFF  [STAND-OFF]  159.26,29.72 0 top
H12  STAND-OFF  [STAND-OFF]  138.94,29.72 0 top
H13  STAND-OFF  [STAND-OFF]  185.17,29.72 0 top
H14  STAND-OFF  [STAND-OFF]  164.85,29.72 0 top
H15  STAND-OFF  [STAND-OFF]  211.07,29.72 0 top
H16  STAND-OFF  [STAND-OFF]  190.75,29.72 0 top
H17  STAND-OFF  [STAND-OFF]  29.72,55.63 0 top
H18  STAND-OFF  [STAND-OFF]  9.4,55.63 0 top
H19  STAND-OFF  [STAND-OFF]  55.63,55.63 0 top
H20  STAND-OFF  [STAND-OFF]  35.31,55.63 0 top
H21  STAND-OFF  [STAND-OFF]  81.53,55.63 0 top
H22  STAND-OFF  [STAND-OFF]  61.21,55.63 0 top
H23  STAND-OFF  [STAND-OFF]  107.44,55.63 0 top
H24  STAND-OFF  [STAND-OFF]  87.12,55.63 0 top
H25  STAND-OFF  [STAND-OFF]  133.35,55.63 0 top
H26  STAND-OFF  [STAND-OFF]  113.03,55.63 0 top
H27  STAND-OFF  [STAND-OFF]  159.26,55.63 0 top
H28  STAND-OFF  [STAND-OFF]  138.94,55.63 0 top
H29  STAND-OFF  [STAND-OFF]  185.17,55.63 0 top
H30  STAND-OFF  [STAND-OFF]  164.85,55.63 0 top
H31  STAND-OFF  [STAND-OFF]  211.07,55.63 0 top
H32  STAND-OFF  [STAND-OFF]  190.75,55.63 0 top
H33  STAND-OFF  [STAND-OFF]  29.72,81.53 0 top
H34  STAND-OFF  [STAND-OFF]  9.4,81.53 0 top
H35  STAND-OFF  [STAND-OFF]  55.63,81.53 0 top
H36  STAND-OFF  [STAND-OFF]  35.31,81.53 0 top
H37  STAND-OFF  [STAND-OFF]  81.53,81.53 0 top
H38  STAND-OFF  [STAND-OFF]  61.21,81.53 0 top
H39  STAND-OFF  [STAND-OFF]  107.44,81.53 0 top
H40  STAND-OFF  [STAND-OFF]  87.12,81.53 0 top
H41  STAND-OFF  [STAND-OFF]  133.35,81.53 0 top
H42  STAND-OFF  [STAND-OFF]  113.03,81.53 0 top
H43  STAND-OFF  [STAND-OFF]  159.26,81.53 0 top
H44  STAND-OFF  [STAND-OFF]  138.94,81.53 0 top
H45  STAND-OFF  [STAND-OFF]  185.17,81.53 0 top
H46  STAND-OFF  [STAND-OFF]  164.85,81.53 0 top
H47  STAND-OFF  [STAND-OFF]  211.07,81.53 0 top
H48  STAND-OFF  [STAND-OFF]  190.75,81.53 0 top
H49  STAND-OFF  [STAND-OFF]  29.72,107.44 0 top
H50  STAND-OFF  [STAND-OFF]  9.4,107.44 0 top
H51  STAND-OFF  [STAND-OFF]  55.63,107.44 0 top
H52  STAND-OFF  [STAND-OFF]  35.31,107.44 0 top
H53  STAND-OFF  [STAND-OFF]  81.53,107.44 0 top
H54  STAND-OFF  [STAND-OFF]  61.21,107.44 0 top
H55  STAND-OFF  [STAND-OFF]  107.44,107.44 0 top
H56  STAND-OFF  [STAND-OFF]  87.12,107.44 0 top
H57  STAND-OFF  [STAND-OFF]  133.35,107.44 0 top
H58  STAND-OFF  [STAND-OFF]  113.03,107.44 0 top
H59  STAND-OFF  [STAND-OFF]  159.26,107.44 0 top
H60  STAND-OFF  [STAND-OFF]  138.94,107.44 0 top
H61  STAND-OFF  [STAND-OFF]  185.17,107.44 0 top
H62  STAND-OFF  [STAND-OFF]  164.85,107.44 0 top
H63  STAND-OFF  [STAND-OFF]  211.07,107.44 0 top
H64  STAND-OFF  [STAND-OFF]  190.75,107.44 0 top
H65  STAND-OFF  [STAND-OFF]  29.72,133.35 0 top
H66  STAND-OFF  [STAND-OFF]  9.4,133.35 0 top
H67  STAND-OFF  [STAND-OFF]  55.63,133.35 0 top
H68  STAND-OFF  [STAND-OFF]  35.31,133.35 0 top
H69  STAND-OFF  [STAND-OFF]  81.53,133.35 0 top
H70  STAND-OFF  [STAND-OFF]  61.21,133.35 0 top
H71  STAND-OFF  [STAND-OFF]  107.44,133.35 0 top
H72  STAND-OFF  [STAND-OFF]  87.12,133.35 0 top
H73  STAND-OFF  [STAND-OFF]  133.35,133.35 0 top
H74  STAND-OFF  [STAND-OFF]  113.03,133.35 0 top
H75  STAND-OFF  [STAND-OFF]  159.26,133.35 0 top
H76  STAND-OFF  [STAND-OFF]  138.94,133.35 0 top
H77  STAND-OFF  [STAND-OFF]  185.17,133.35 0 top
H78  STAND-OFF  [STAND-OFF]  164.85,133.35 0 top
H79  STAND-OFF  [STAND-OFF]  211.07,133.35 0 top
H80  STAND-OFF  [STAND-OFF]  190.75,133.35 0 top
J1  Qwiic Right Angle  [1X04_1MM_RA]  11.94,19.56 270 top
J2  Serial Interface  [FTDI_BASIC]  25.91,30.99 180 top
J3  [1X02_NO_SILK]  15.75,8.13 180 top
J4  Qwiic Right Angle  [1X04_1MM_RA]  27.18,19.56 90 top
J5  Flash Programming  [2X3_TEST_POINTS]  19.56,25.91 270 bottom
J6  [1X04_NO_SILK]  51.82,8.13 180 top
J7  Qwiic Right Angle  [1X04_1MM_RA]  37.85,19.56 270 top
J8  [1X04_NO_SILK]  25.91,8.13 180 top
J9  [1X02_NO_SILK]  41.66,8.13 180 top
J10  Serial Interface  [FTDI_BASIC]  51.82,30.99 180 top
J11  Qwiic Right Angle  [1X04_1MM_RA]  53.09,19.56 90 top
J12  Flash Programming  [2X3_TEST_POINTS]  45.47,25.91 270 bottom
J13  [1X04_NO_SILK]  77.72,8.13 180 top
J14  Qwiic Right Angle  [1X04_1MM_RA]  63.75,19.56 270 top
J15  [1X02_NO_SILK]  67.56,8.13 180 top
J16  Serial Interface  [FTDI_BASIC]  77.72,30.99 180 top
J17  Qwiic Right Angle  [1X04_1MM_RA]  78.99,19.56 90 top
J18  Flash Programming  [2X3_TEST_POINTS]  71.37,25.91 270 bottom
J19  [1X04_NO_SILK]  103.63,8.13 180 top
J20  Qwiic Right Angle  [1X04_1MM_RA]  89.66,19.56 270 top
J21  [1X02_NO_SILK]  93.47,8.13 180 top
J22  Serial Interface  [FTDI_BASIC]  103.63,30.99 180 top
J23  Qwiic Right Angle  [1X04_1MM_RA]  104.9,19.56 90 top
J24  Flash Programming  [2X3_TEST_POINTS]  97.28,25.91 270 bottom
J25  [1X04_NO_SILK]  129.54,8.13 180 top
J26  Qwiic Right Angle  [1X04_1MM_RA]  115.57,19.56 270 top
J27  [1X02_NO_SILK]  119.38,8.13 180 top
J28  Serial Interface  [FTDI_BASIC]  129.54,30.99 180 top
J29  Qwiic Right Angle  [1X04_1MM_RA]  130.81,19.56 90 top
J30  Flash Programming  [2X3_TEST_POINTS]  123.19,25.91 270 bottom
J31  [1X04_NO_SILK]  155.45,8.13 180 top
J32  Qwiic Right Angle  [1X04_1MM_RA]  141.48,19.56 270 top
J33  [1X02_NO_SILK]  145.29,8.13 180 top
J34  Serial Interface  [FTDI_BASIC]  155.45,30.99 180 top
J35  Qwiic Right Angle  [1X04_1MM_RA]  156.72,19.56 90 top
J36  Flash Programming  [2X3_TEST_POINTS]  149.1,25.91 270 bottom
J37  [1X04_NO_SILK]  181.36,8.13 180 top
J38  Qwiic Right Angle  [1X04_1MM_RA]  167.39,19.56 270 top
J39  [1X02_NO_SILK]  171.2,8.13 180 top
J40  Serial Interface  [FTDI_BASIC]  181.36,30.99 180 top
J41  Qwiic Right Angle  [1X04_1MM_RA]  182.63,19.56 90 top
J42  Flash Programming  [2X3_TEST_POINTS]  175.01,25.91 270 bottom
J43  [1X04_NO_SILK]  207.26,8.13 180 top
J44  Qwiic Right Angle  [1X04_1MM_RA]  193.29,19.56 270 top
J45  [1X02_NO_SILK]  197.1,8.13 180 top
J46  Serial Interface  [FTDI_BASIC]  207.26,30.99 180 top
J47  Qwiic Right Angle  [1X04_1MM_RA]  208.53,19.56 90 top
J48  Flash Programming  [2X3_TEST_POINTS]  200.91,25.91 270 bottom
J49  [1X04_NO_SILK]  25.91,34.04 180 top
J50  Qwiic Right Angle  [1X04_1MM_RA]  11.94,45.47 270 top
J51  [1X02_NO_SILK]  15.75,34.04 180 top
J52  Serial Interface  [FTDI_BASIC]  25.91,56.9 180 top
J53  Qwiic Right Angle  [1X04_1MM_RA]  27.18,45.47 90 top
J54  Flash Programming  [2X3_TEST_POINTS]  19.56,51.82 270 bottom
J55  [1X04_NO_SILK]  51.82,34.04 180 top
J56  Qwiic Right Angle  [1X04_1MM_RA]  37.85,45.47 270 top
J57  [1X02_NO_SILK]  41.66,34.04 180 top
J58  Serial Interface  [FTDI_BASIC]  51.82,56.9 180 top
J59  Qwiic Right Angle  [1X04_1MM_RA]  53.09,45.47 90 top
J60  Flash Programming  [2X3_TEST_POINTS]  45.47,51.82 270 bottom
J61  [1X04_NO_SILK]  77.72,34.04 180 top
J62  Qwiic Right Angle  [1X04_1MM_RA]  63.75,45.47 270 top
J63  [1X02_NO_SILK]  67.56,34.04 180 top
J64  Serial Interface  [FTDI_BASIC]  77.72,56.9 180 top
J65  Qwiic Right Angle  [1X04_1MM_RA]  78.99,45.47 90 top
J66  Flash Programming  [2X3_TEST_POINTS]  71.37,51.82 270 bottom
J67  [1X04_NO_SILK]  103.63,34.04 180 top
J68  Qwiic Right Angle  [1X04_1MM_RA]  89.66,45.47 270 top
J69  [1X02_NO_SILK]  93.47,34.04 180 top
J70  Serial Interface  [FTDI_BASIC]  103.63,56.9 180 top
J71  Qwiic Right Angle  [1X04_1MM_RA]  104.9,45.47 90 top
J72  Flash Programming  [2X3_TEST_POINTS]  97.28,51.82 270 bottom
J73  [1X04_NO_SILK]  129.54,34.04 180 top
J74  Qwiic Right Angle  [1X04_1MM_RA]  115.57,45.47 270 top
J75  [1X02_NO_SILK]  119.38,34.04 180 top
J76  Serial Interface  [FTDI_BASIC]  129.54,56.9 180 top
J77  Qwiic Right Angle  [1X04_1MM_RA]  130.81,45.47 90 top
J78  Flash Programming  [2X3_TEST_POINTS]  123.19,51.82 270 bottom
J79  [1X04_NO_SILK]  155.45,34.04 180 top
J80  Qwiic Right Angle  [1X04_1MM_RA]  141.48,45.47 270 top
J81  [1X02_NO_SILK]  145.29,34.04 180 top
J82  Serial Interface  [FTDI_BASIC]  155.45,56.9 180 top
J83  Qwiic Right Angle  [1X04_1MM_RA]  156.72,45.47 90 top
J84  Flash Programming  [2X3_TEST_POINTS]  149.1,51.82 270 bottom
J85  [1X04_NO_SILK]  181.36,34.04 180 top
J86  Qwiic Right Angle  [1X04_1MM_RA]  167.39,45.47 270 top
J87  [1X02_NO_SILK]  171.2,34.04 180 top
J88  Serial Interface  [FTDI_BASIC]  181.36,56.9 180 top
J89  Qwiic Right Angle  [1X04_1MM_RA]  182.63,45.47 90 top
J90  Flash Programming  [2X3_TEST_POINTS]  175.01,51.82 270 bottom
J91  [1X04_NO_SILK]  207.26,34.04 180 top
J92  Qwiic Right Angle  [1X04_1MM_RA]  193.29,45.47 270 top
J93  [1X02_NO_SILK]  197.1,34.04 180 top
J94  Serial Interface  [FTDI_BASIC]  207.26,56.9 180 top
J95  Qwiic Right Angle  [1X04_1MM_RA]  208.53,45.47 90 top
J96  Flash Programming  [2X3_TEST_POINTS]  200.91,51.82 270 bottom
J97  [1X04_NO_SILK]  25.91,59.94 180 top
J98  Qwiic Right Angle  [1X04_1MM_RA]  11.94,71.37 270 top
J99  [1X02_NO_SILK]  15.75,59.94 180 top
J100  Serial Interface  [FTDI_BASIC]  25.91,82.8 180 top
J101  Qwiic Right Angle  [1X04_1MM_RA]  27.18,71.37 90 top
J102  Flash Programming  [2X3_TEST_POINTS]  19.56,77.72 270 bottom
J103  [1X04_NO_SILK]  51.82,59.94 180 top
J104  Qwiic Right Angle  [1X04_1MM_RA]  37.85,71.37 270 top
J105  [1X02_NO_SILK]  41.66,59.94 180 top
J106  Serial Interface  [FTDI_BASIC]  51.82,82.8 180 top
J107  Qwiic Right Angle  [1X04_1MM_RA]  53.09,71.37 90 top
J108  Flash Programming  [2X3_TEST_POINTS]  45.47,77.72 270 bottom
J109  [1X04_NO_SILK]  77.72,59.94 180 top
J110  Qwiic Right Angle  [1X04_1MM_RA]  63.75,71.37 270 top
J111  [1X02_NO_SILK]  67.56,59.94 180 top
J112  Serial Interface  [FTDI_BASIC]  77.72,82.8 180 top
J113  Qwiic Right Angle  [1X04_1MM_RA]  78.99,71.37 90 top
J114  Flash Programming  [2X3_TEST_POINTS]  71.37,77.72 270 bottom
J115  [1X04_NO_SILK]  103.63,59.94 180 top
J116  Qwiic Right Angle  [1X04_1MM_RA]  89.66,71.37 270 top
J117  [1X02_NO_SILK]  93.47,59.94 180 top
J118  Serial Interface  [FTDI_BASIC]  103.63,82.8 180 top
J119  Qwiic Right Angle  [1X04_1MM_RA]  104.9,71.37 90 top
J120  Flash Programming  [2X3_TEST_POINTS]  97.28,77.72 270 bottom
J121  [1X04_NO_SILK]  129.54,59.94 180 top
J122  Qwiic Right Angle  [1X04_1MM_RA]  115.57,71.37 270 top
J123  [1X02_NO_SILK]  119.38,59.94 180 top
J124  Serial Interface  [FTDI_BASIC]  129.54,82.8 180 top
J125  Qwiic Right Angle  [1X04_1MM_RA]  130.81,71.37 90 top
J126  Flash Programming  [2X3_TEST_POINTS]  123.19,77.72 270 bottom
J127  [1X04_NO_SILK]  155.45,59.94 180 top
J128  Qwiic Right Angle  [1X04_1MM_RA]  141.48,71.37 270 top
J129  [1X02_NO_SILK]  145.29,59.94 180 top
J130  Serial Interface  [FTDI_BASIC]  155.45,82.8 180 top
J131  Qwiic Right Angle  [1X04_1MM_RA]  156.72,71.37 90 top
J132  Flash Programming  [2X3_TEST_POINTS]  149.1,77.72 270 bottom
J133  [1X04_NO_SILK]  181.36,59.94 180 top
J134  Qwiic Right Angle  [1X04_1MM_RA]  167.39,71.37 270 top
J135  [1X02_NO_SILK]  171.2,59.94 180 top
J136  Serial Interface  [FTDI_BASIC]  181.36,82.8 180 top
J137  Qwiic Right Angle  [1X04_1MM_RA]  182.63,71.37 90 top
J138  Flash Programming  [2X3_TEST_POINTS]  175.01,77.72 270 bottom
J139  [1X04_NO_SILK]  207.26,59.94 180 top
J140  Qwiic Right Angle  [1X04_1MM_RA]  193.29,71.37 270 top
J141  [1X02_NO_SILK]  197.1,59.94 180 top
J142  Serial Interface  [FTDI_BASIC]  207.26,82.8 180 top
J143  Qwiic Right Angle  [1X04_1MM_RA]  208.53,71.37 90 top
J144  Flash Programming  [2X3_TEST_POINTS]  200.91,77.72 270 bottom
J145  [1X04_NO_SILK]  25.91,85.85 180 top
J146  Qwiic Right Angle  [1X04_1MM_RA]  11.94,97.28 270 top
J147  [1X02_NO_SILK]  15.75,85.85 180 top
J148  Serial Interface  [FTDI_BASIC]  25.91,108.71 180 top
J149  Qwiic Right Angle  [1X04_1MM_RA]  27.18,97.28 90 top
J150  Flash Programming  [2X3_TEST_POINTS]  19.56,103.63 270 bottom
J151  [1X04_NO_SILK]  51.82,85.85 180 top
J152  Qwiic Right Angle  [1X04_1MM_RA]  37.85,97.28 270 top
J153  [1X02_NO_SILK]  41.66,85.85 180 top
J154  Serial Interface  [FTDI_BASIC]  51.82,108.71 180 top
J155  Qwiic Right Angle  [1X04_1MM_RA]  53.09,97.28 90 top
J156  Flash Programming  [2X3_TEST_POINTS]  45.47,103.63 270 bottom
J157  [1X04_NO_SILK]  77.72,85.85 180 top
J158  Qwiic Right Angle  [1X04_1MM_RA]  63.75,97.28 270 top
J159  [1X02_NO_SILK]  67.56,85.85 180 top
J160  Serial Interface  [FTDI_BASIC]  77.72,108.71 180 top
J161  Qwiic Right Angle  [1X04_1MM_RA]  78.99,97.28 90 top
J162  Flash Programming  [2X3_TEST_POINTS]  71.37,103.63 270 bottom
J163  [1X04_NO_SILK]  103.63,85.85 180 top
J164  Qwiic Right Angle  [1X04_1MM_RA]  89.66,97.28 270 top
J165  [1X02_NO_SILK]  93.47,85.85 180 top
J166  Serial Interface  [FTDI_BASIC]  103.63,108.71 180 top
J167  Qwiic Right Angle  [1X04_1MM_RA]  104.9,97.28 90 top
J168  Flash Programming  [2X3_TEST_POINTS]  97.28,103.63 270 bottom
J169  [1X04_NO_SILK]  129.54,85.85 180 top
J170  Qwiic Right Angle  [1X04_1MM_RA]  115.57,97.28 270 top
J171  [1X02_NO_SILK]  119.38,85.85 180 top
J172  Serial Interface  [FTDI_BASIC]  129.54,108.71 180 top
J173  Qwiic Right Angle  [1X04_1MM_RA]  130.81,97.28 90 top
J174  Flash Programming  [2X3_TEST_POINTS]  123.19,103.63 270 bottom
J175  [1X04_NO_SILK]  155.45,85.85 180 top
J176  Qwiic Right Angle  [1X04_1MM_RA]  141.48,97.28 270 top
J177  [1X02_NO_SILK]  145.29,85.85 180 top
J178  Serial Interface  [FTDI_BASIC]  155.45,108.71 180 top
J179  Qwiic Right Angle  [1X04_1MM_RA]  156.72,97.28 90 top
J180  Flash Programming  [2X3_TEST_POINTS]  149.1,103.63 270 bottom
J181  [1X04_NO_SILK]  181.36,85.85 180 top
J182  Qwiic Right Angle  [1X04_1MM_RA]  167.39,97.28 270 top
J183  [1X02_NO_SILK]  171.2,85.85 180 top
J184  Serial Interface  [FTDI_BASIC]  181.36,108.71 180 top
J185  Qwiic Right Angle  [1X04_1MM_RA]  182.63,97.28 90 top
J186  Flash Programming  [2X3_TEST_POINTS]  175.01,103.63 270 bottom
J187  [1X04_NO_SILK]  207.26,85.85 180 top
J188  Qwiic Right Angle  [1X04_1MM_RA]  193.29,97.28 270 top
J189  [1X02_NO_SILK]  197.1,85.85 180 top
J190  Serial Interface  [FTDI_BASIC]  207.26,108.71 180 top
J191  Qwiic Right Angle  [1X04_1MM_RA]  208.53,97.28 90 top
J192  Flash Programming  [2X3_TEST_POINTS]  200.91,103.63 270 bottom
J193  [1X04_NO_SILK]  25.91,111.76 180 top
J194  Qwiic Right Angle  [1X04_1MM_RA]  11.94,123.19 270 top
J195  [1X02_NO_SILK]  15.75,111.76 180 top
J196  Serial Interface  [FTDI_BASIC]  25.91,134.62 180 top
J197  Qwiic Right Angle  [1X04_1MM_RA]  27.18,123.19 90 top
J198  Flash Programming  [2X3_TEST_POINTS]  19.56,129.54 270 bottom
J199  [1X04_NO_SILK]  51.82,111.76 180 top
J200  Qwiic Right Angle  [1X04_1MM_RA]  37.85,123.19 270 top
J201  [1X02_NO_SILK]  41.66,111.76 180 top
J202  Serial Interface  [FTDI_BASIC]  51.82,134.62 180 top
J203  Qwiic Right Angle  [1X04_1MM_RA]  53.09,123.19 90 top
J204  Flash Programming  [2X3_TEST_POINTS]  45.47,129.54 270 bottom
J205  [1X04_NO_SILK]  77.72,111.76 180 top
J206  Qwiic Right Angle  [1X04_1MM_RA]  63.75,123.19 270 top
J207  [1X02_NO_SILK]  67.56,111.76 180 top
J208  Serial Interface  [FTDI_BASIC]  77.72,134.62 180 top
J209  Qwiic Right Angle  [1X04_1MM_RA]  78.99,123.19 90 top
J210  Flash Programming  [2X3_TEST_POINTS]  71.37,129.54 270 bottom
J211  [1X04_NO_SILK]  103.63,111.76 180 top
J212  Qwiic Right Angle  [1X04_1MM_RA]  89.66,123.19 270 top
J213  [1X02_NO_SILK]  93.47,111.76 180 top
J214  Serial Interface  [FTDI_BASIC]  103.63,134.62 180 top
J215  Qwiic Right Angle  [1X04_1MM_RA]  104.9,123.19 90 top
J216  Flash Programming  [2X3_TEST_POINTS]  97.28,129.54 270 bottom
J217  [1X04_NO_SILK]  129.54,111.76 180 top
J218  Qwiic Right Angle  [1X04_1MM_RA]  115.57,123.19 270 top
J219  [1X02_NO_SILK]  119.38,111.76 180 top
J220  Serial Interface  [FTDI_BASIC]  129.54,134.62 180 top
J221  Qwiic Right Angle  [1X04_1MM_RA]  130.81,123.19 90 top
J222  Flash Programming  [2X3_TEST_POINTS]  123.19,129.54 270 bottom
J223  [1X04_NO_SILK]  155.45,111.76 180 top
J224  Qwiic Right Angle  [1X04_1MM_RA]  141.48,123.19 270 top
J225  [1X02_NO_SILK]  145.29,111.76 180 top
J226  Serial Interface  [FTDI_BASIC]  155.45,134.62 180 top
J227  Qwiic Right Angle  [1X04_1MM_RA]  156.72,123.19 90 top
J228  Flash Programming  [2X3_TEST_POINTS]  149.1,129.54 270 bottom
J229  [1X04_NO_SILK]  181.36,111.76 180 top
J230  Qwiic Right Angle  [1X04_1MM_RA]  167.39,123.19 270 top
J231  [1X02_NO_SILK]  171.2,111.76 180 top
J232  Serial Interface  [FTDI_BASIC]  181.36,134.62 180 top
J233  Qwiic Right Angle  [1X04_1MM_RA]  182.63,123.19 90 top
J234  Flash Programming  [2X3_TEST_POINTS]  175.01,129.54 270 bottom
J235  [1X04_NO_SILK]  207.26,111.76 180 top
J236  Qwiic Right Angle  [1X04_1MM_RA]  193.29,123.19 270 top
J237  [1X02_NO_SILK]  197.1,111.76 180 top
J238  Serial Interface  [FTDI_BASIC]  207.26,134.62 180 top
J239  Qwiic Right Angle  [1X04_1MM_RA]  208.53,123.19 90 top
J240  Flash Programming  [2X3_TEST_POINTS]  200.91,129.54 270 bottom
JP1  [SMT-JUMPER_3_2-NC_PASTE_SILK]  10.67,13.21 90 top
JP2  [SMT-JUMPER_2_NO_SILK]  14.48,18.29 90 bottom
JP3  [SMT-JUMPER_2_NO_SILK]  40.39,18.29 90 bottom
JP4  [SMT-JUMPER_2_NC_PASTE_NO-SILK]  23.75,16.45 270 top
JP5  [SMT-JUMPER_3_2-NC_PASTE_SILK]  36.58,13.21 90 top
JP6  [SMT-JUMPER_2_NC_PASTE_NO-SILK]  49.66,16.45 270 top
JP7  [SMT-JUMPER_2_NO_SILK]  66.29,18.29 90 bottom
JP8  [SMT-JUMPER_3_2-NC_PASTE_SILK]  62.48,13.21 90 top
JP9  [SMT-JUMPER_2_NC_PASTE_NO-SILK]  75.56,16.45 270 top
JP10  [SMT-JUMPER_2_NO_SILK]  92.2,18.29 90 bottom
JP11  [SMT-JUMPER_3_2-NC_PASTE_SILK]  88.39,13.21 90 top
JP12  [SMT-JUMPER_2_NC_PASTE_NO-SILK]  101.47,16.45 270 top
JP13  [SMT-JUMPER_2_NO_SILK]  118.11,18.29 90 bottom
JP14  [SMT-JUMPER_3_2-NC_PASTE_SILK]  114.3,13.21 90 top
JP15  [SMT-JUMPER_2_NC_PASTE_NO-SILK]  127.38,16.45 270 top
JP16  [SMT-JUMPER_2_NO_SILK]  144.02,18.29 90 bottom
JP17  [SMT-JUMPER_3_2-NC_PASTE_SILK]  140.21,13.21 90 top
JP18  [SMT-JUMPER_2_NC_PASTE_NO-SILK]  153.29,16.45 270 top
JP19  [SMT-JUMPER_2_NO_SILK]  169.93,18.29 90 bottom
JP20  [SMT-JUMPER_3_2-NC_PASTE_SILK]  166.12,13.21 90 top
JP21  [SMT-JUMPER_2_NC_PASTE_NO-SILK]  179.2,16.45 270 top
JP22  [SMT-JUMPER_2_NO_SILK]  195.83,18.29 90 bottom
JP23  [SMT-JUMPER_3_2-NC_PASTE_SILK]  192.02,13.21 90 top
JP24  [SMT-JUMPER_2_NC_PASTE_NO-SILK]  205.1,16.45 270 top
JP25  [SMT-JUMPER_2_NO_SILK]  14.48,44.2 90 bottom
JP26  [SMT-JUMPER_3_2-NC_PASTE_SILK]  10.67,39.12 90 top
JP27  [SMT-JUMPER_2_NC_PASTE_NO-SILK]  23.75,42.35 270 top
JP28  [SMT-JUMPER_2_NO_SILK]  40.39,44.2 90 bottom
JP29  [SMT-JUMPER_3_2-NC_PASTE_SILK]  36.58,39.12 90 top
JP30  [SMT-JUMPER_2_NC_PASTE_NO-SILK]  49.66,42.35 270 top
JP31  [SMT-JUMPER_2_NO_SILK]  66.29,44.2 90 bottom
JP32  [SMT-JUMPER_3_2-NC_PASTE_SILK]  62.48,39.12 90 top
JP33  [SMT-JUMPER_2_NC_PASTE_NO-SILK]  75.56,42.35 270 top
JP34  [SMT-JUMPER_2_NO_SILK]  92.2,44.2 90 bottom
JP35  [SMT-JUMPER_3_2-NC_PASTE_SILK]  88.39,39.12 90 top
JP36  [SMT-JUMPER_2_NC_PASTE_NO-SILK]  101.47,42.35 270 top
JP37  [SMT-JUMPER_2_NO_SILK]  118.11,44.2 90 bottom
JP38  [SMT-JUMPER_3_2-NC_PASTE_SILK]  114.3,39.12 90 top
JP39  [SMT-JUMPER_2_NC_PASTE_NO-SILK]  127.38,42.35 270 top
JP40  [SMT-JUMPER_2_NO_SILK]  144.02,44.2 90 bottom
JP41  [SMT-JUMPER_3_2-NC_PASTE_SILK]  140.21,39.12 90 top
JP42  [SMT-JUMPER_2_NC_PASTE_NO-SILK]  153.29,42.35 270 top
JP43  [SMT-JUMPER_2_NO_SILK]  169.93,44.2 90 bottom
JP44  [SMT-JUMPER_3_2-NC_PASTE_SILK]  166.12,39.12 90 top
JP45  [SMT-JUMPER_2_NC_PASTE_NO-SILK]  179.2,42.35 270 top
JP46  [SMT-JUMPER_2_NO_SILK]  195.83,44.2 90 bottom
JP47  [SMT-JUMPER_3_2-NC_PASTE_SILK]  192.02,39.12 90 top
JP48  [SMT-JUMPER_2_NC_PASTE_NO-SILK]  205.1,42.35 270 top
JP49  [SMT-JUMPER_2_NO_SILK]  14.48,70.1 90 bottom
JP50  [SMT-JUMPER_3_2-NC_PASTE_SILK]  10.67,65.02 90 top
JP51  [SMT-JUMPER_2_NC_PASTE_NO-SILK]  23.75,68.26 270 top
JP52  [SMT-JUMPER_2_NO_SILK]  40.39,70.1 90 bottom
JP53  [SMT-JUMPER_3_2-NC_PASTE_SILK]  36.58,65.02 90 top
JP54  [SMT-JUMPER_2_NC_PASTE_NO-SILK]  49.66,68.26 270 top
JP55  [SMT-JUMPER_2_NO_SILK]  66.29,70.1 90 bottom
JP56  [SMT-JUMPER_3_2-NC_PASTE_SILK]  62.48,65.02 90 top
JP57  [SMT-JUMPER_2_NC_PASTE_NO-SILK]  75.56,68.26 270 top
JP58  [SMT-JUMPER_2_NO_SILK]  92.2,70.1 90 bottom
JP59  [SMT-JUMPER_3_2-NC_PASTE_SILK]  88.39,65.02 90 top
JP60  [SMT-JUMPER_2_NC_PASTE_NO-SILK]  101.47,68.26 270 top
JP61  [SMT-JUMPER_2_NO_SILK]  118.11,70.1 90 bottom
JP62  [SMT-JUMPER_3_2-NC_PASTE_SILK]  114.3,65.02 90 top
JP63  [SMT-JUMPER_2_NC_PASTE_NO-SILK]  127.38,68.26 270 top
JP64  [SMT-JUMPER_2_NO_SILK]  144.02,70.1 90 bottom
JP65  [SMT-JUMPER_3_2-NC_PASTE_SILK]  140.21,65.02 90 top
JP66  [SMT-JUMPER_2_NC_PASTE_NO-SILK]  153.29,68.26 270 top
JP67  [SMT-JUMPER_2_NO_SILK]  169.93,70.1 90 bottom
JP68  [SMT-JUMPER_3_2-NC_PASTE_SILK]  166.12,65.02 90 top
JP69  [SMT-JUMPER_2_NC_PASTE_NO-SILK]  179.2,68.26 270 top
JP70  [SMT-JUMPER_2_NO_SILK]  195.83,70.1 90 bottom
JP71  [SMT-JUMPER_3_2-NC_PASTE_SILK]  192.02,65.02 90 top
JP72  [SMT-JUMPER_2_NC_PASTE_NO-SILK]  205.1,68.26 270 top
JP73  [SMT-JUMPER_2_NO_SILK]  14.48,96.01 90 bottom
JP74  [SMT-JUMPER_3_2-NC_PASTE_SILK]  10.67,90.93 90 top
JP75  [SMT-JUMPER_2_NC_PASTE_NO-SILK]  23.75,94.17 270 top
JP76  [SMT-JUMPER_2_NO_SILK]  40.39,96.01 90 bottom
JP77  [SMT-JUMPER_3_2-NC_PASTE_SILK]  36.58,90.93 90 top
JP78  [SMT-JUMPER_2_NC_PASTE_NO-SILK]  49.66,94.17 270 top
JP79  [SMT-JUMPER_2_NO_SILK]  66.29,96.01 90 bottom
JP80  [SMT-JUMPER_3_2-NC_PASTE_SILK]  62.48,90.93 90 top
JP81  [SMT-JUMPER_2_NC_PASTE_NO-SILK]  75.56,94.17 270 top
JP82  [SMT-JUMPER_2_NO_SILK]  92.2,96.01 90 bottom
JP83  [SMT-JUMPER_3_2-NC_PASTE_SILK]  88.39,90.93 90 top
JP84  [SMT-JUMPER_2_NC_PASTE_NO-SILK]  101.47,94.17 270 top
JP85  [SMT-JUMPER_2_NO_SILK]  118.11,96.01 90 bottom
JP86  [SMT-JUMPER_3_2-NC_PASTE_SILK]  114.3,90.93 90 top
JP87  [SMT-JUMPER_2_NC_PASTE_NO-SILK]  127.38,94.17 270 top
JP88  [SMT-JUMPER_2_NO_SILK]  144.02,96.01 90 bottom
JP89  [SMT-JUMPER_3_2-NC_PASTE_SILK]  140.21,90.93 90 top
JP90  [SMT-JUMPER_2_NC_PASTE_NO-SILK]  153.29,94.17 270 top
JP91  [SMT-JUMPER_2_NO_SILK]  169.93,96.01 90 bottom
JP92  [SMT-JUMPER_3_2-NC_PASTE_SILK]  166.12,90.93 90 top
JP93  [SMT-JUMPER_2_NC_PASTE_NO-SILK]  179.2,94.17 270 top
JP94  [SMT-JUMPER_2_NO_SILK]  195.83,96.01 90 bottom
JP95  [SMT-JUMPER_3_2-NC_PASTE_SILK]  192.02,90.93 90 top
JP96  [SMT-JUMPER_2_NC_PASTE_NO-SILK]  205.1,94.17 270 top
JP97  [SMT-JUMPER_2_NO_SILK]  14.48,121.92 90 bottom
JP98  [SMT-JUMPER_3_2-NC_PASTE_SILK]  10.67,116.84 90 top
JP99  [SMT-JUMPER_2_NC_PASTE_NO-SILK]  23.75,120.08 270 top
JP100  [SMT-JUMPER_2_NO_SILK]  40.39,121.92 90 bottom
JP101  [SMT-JUMPER_3_2-NC_PASTE_SILK]  36.58,116.84 90 top
JP102  [SMT-JUMPER_2_NC_PASTE_NO-SILK]  49.66,120.08 270 top
JP103  [SMT-JUMPER_2_NO_SILK]  66.29,121.92 90 bottom
JP104  [SMT-JUMPER_3_2-NC_PASTE_SILK]  62.48,116.84 90 top
JP105  [SMT-JUMPER_2_NC_PASTE_NO-SILK]  75.56,120.08 270 top
JP106  [SMT-JUMPER_2_NO_SILK]  92.2,121.92 90 bottom
JP107  [SMT-JUMPER_3_2-NC_PASTE_SILK]  88.39,116.84 90 top
JP108  [SMT-JUMPER_2_NC_PASTE_NO-SILK]  101.47,120.08 270 top
JP109  [SMT-JUMPER_2_NO_SILK]  118.11,121.92 90 bottom
JP110  [SMT-JUMPER_3_2-NC_PASTE_SILK]  114.3,116.84 90 top
JP111  [SMT-JUMPER_2_NC_PASTE_NO-SILK]  127.38,120.08 270 top
JP112  [SMT-JUMPER_2_NO_SILK]  144.02,121.92 90 bottom
JP113  [SMT-JUMPER_3_2-NC_PASTE_SILK]  140.21,116.84 90 top
JP114  [SMT-JUMPER_2_NC_PASTE_NO-SILK]  153.29,120.08 270 top
JP115  [SMT-JUMPER_2_NO_SILK]  169.93,121.92 90 bottom
JP116  [SMT-JUMPER_3_2-NC_PASTE_SILK]  166.12,116.84 90 top
JP117  [SMT-JUMPER_2_NC_PASTE_NO-SILK]  179.2,120.08 270 top
JP118  [SMT-JUMPER_2_NO_SILK]  195.83,121.92 90 bottom
JP119  [SMT-JUMPER_3_2-NC_PASTE_SILK]  192.02,116.84 90 top
JP120  [SMT-JUMPER_2_NC_PASTE_NO-SILK]  205.1,120.08 270 top
LOGO1  SFE_LOGO_FLAME.2_INCH  [SFE_LOGO_FLAME_.2]  27.81,8.13 0 top
LOGO2  SFE_LOGO_FLAME.2_INCH  [SFE_LOGO_FLAME_.2]  31.88,8.13 0 bottom
LOGO3  OSHW-LOGOS  [OSHW-LOGO-S]  35.31,25.91 0 bottom
LOGO4  OSHW-LOGOS  [OSHW-LOGO-S]  9.4,25.91 0 bottom
LOGO5  SFE_LOGO_FLAME.2_INCH  [SFE_LOGO_FLAME_.2]  53.72,8.13 0 top
LOGO6  SFE_LOGO_FLAME.2_INCH  [SFE_LOGO_FLAME_.2]  57.78,8.13 0 bottom
LOGO7  OSHW-LOGOS  [OSHW-LOGO-S]  61.21,25.91 0 bottom
LOGO8  SFE_LOGO_FLAME.2_INCH  [SFE_LOGO_FLAME_.2]  79.63,8.13 0 top
LOGO9  SFE_LOGO_FLAME.2_INCH  [SFE_LOGO_FLAME_.2]  83.69,8.13 0 bottom
LOGO10  OSHW-LOGOS  [OSHW-LOGO-S]  87.12,25.91 0 bottom
LOGO11  SFE_LOGO_FLAME.2_INCH  [SFE_LOGO_FLAME_.2]  105.54,8.13 0 top
LOGO12  SFE_LOGO_FLAME.2_INCH  [SFE_LOGO_FLAME_.2]  109.6,8.13 0 bottom
LOGO13  OSHW-LOGOS  [OSHW-LOGO-S]  113.03,25.91 0 bottom
LOGO14  SFE_LOGO_FLAME.2_INCH  [SFE_LOGO_FLAME_.2]  131.44,8.13 0 top
LOGO15  SFE_LOGO_FLAME.2_INCH  [SFE_LOGO_FLAME_.2]  135.51,8.13 0 bottom
LOGO16  OSHW-LOGOS  [OSHW-LOGO-S]  138.94,25.91 0 bottom
LOGO17  SFE_LOGO_FLAME.2_INCH  [SFE_LOGO_FLAME_.2]  157.35,8.13 0 top
LOGO18  SFE_LOGO_FLAME.2_INCH  [SFE_LOGO_FLAME_.2]  161.42,8.13 0 bottom
LOGO19  OSHW-LOGOS  [OSHW-LOGO-S]  164.85,25.91 0 bottom
LOGO20  SFE_LOGO_FLAME.2_INCH  [SFE_LOGO_FLAME_.2]  183.26,8.13 0 top
LOGO21  SFE_LOGO_FLAME.2_INCH  [SFE_LOGO_FLAME_.2]  187.32,8.13 0 bottom
LOGO22  OSHW-LOGOS  [OSHW-LOGO-S]  190.75,25.91 0 bottom
LOGO23  SFE_LOGO_FLAME.2_INCH  [SFE_LOGO_FLAME_.2]  209.17,8.13 0 top
LOGO24  SFE_LOGO_FLAME.2_INCH  [SFE_LOGO_FLAME_.2]  213.23,8.13 0 bottom
LOGO25  OSHW-LOGOS  [OSHW-LOGO-S]  9.4,51.82 0 bottom
LOGO26  SFE_LOGO_FLAME.2_INCH  [SFE_LOGO_FLAME_.2]  27.81,34.04 0 top
LOGO27  SFE_LOGO_FLAME.2_INCH  [SFE_LOGO_FLAME_.2]  31.88,34.04 0 bottom
LOGO28  OSHW-LOGOS  [OSHW-LOGO-S]  35.31,51.82 0 bottom
LOGO29  SFE_LOGO_FLAME.2_INCH  [SFE_LOGO_FLAME_.2]  53.72,34.04 0 top
LOGO30  SFE_LOGO_FLAME.2_INCH  [SFE_LOGO_FLAME_.2]  57.78,34.04 0 bottom
LOGO31  OSHW-LOGOS  [OSHW-LOGO-S]  61.21,51.82 0 bottom
LOGO32  SFE_LOGO_FLAME.2_INCH  [SFE_LOGO_FLAME_.2]  79.63,34.04 0 top
LOGO33  SFE_LOGO_FLAME.2_INCH  [SFE_LOGO_FLAME_.2]  83.69,34.04 0 bottom
LOGO34  OSHW-LOGOS  [OSHW-LOGO-S]  87.12,51.82 0 bottom
LOGO35  SFE_LOGO_FLAME.2_INCH  [SFE_LOGO_FLAME_.2]  105.54,34.04 0 top
LOGO36  SFE_LOGO_FLAME.2_INCH  [SFE_LOGO_FLAME_.2]  109.6,34.04 0 bottom
LOGO37  OSHW-LOGOS  [OSHW-LOGO-S]  113.03,51.82 0 bottom
LOGO38  SFE_LOGO_FLAME.2_INCH  [SFE_LOGO_FLAME_.2]  131.44,34.04 0 top
LOGO39  SFE_LOGO_FLAME.2_INCH  [SFE_LOGO_FLAME_.2]  135.51,34.04 0 bottom
LOGO40  OSHW-LOGOS  [OSHW-LOGO-S]  138.94,51.82 0 bottom
LOGO41  SFE_LOGO_FLAME.2_INCH  [SFE_LOGO_FLAME_.2]  157.35,34.04 0 top
LOGO42  SFE_LOGO_FLAME.2_INCH  [SFE_LOGO_FLAME_.2]  161.42,34.04 0 bottom
LOGO43  OSHW-LOGOS  [OSHW-LOGO-S]  164.85,51.82 0 bottom
LOGO44  SFE_LOGO_FLAME.2_INCH  [SFE_LOGO_FLAME_.2]  183.26,34.04 0 top
LOGO45  SFE_LOGO_FLAME.2_INCH  [SFE_LOGO_FLAME_.2]  187.32,34.04 0 bottom
LOGO46  OSHW-LOGOS  [OSHW-LOGO-S]  190.75,51.82 0 bottom
LOGO47  SFE_LOGO_FLAME.2_INCH  [SFE_LOGO_FLAME_.2]  209.17,34.04 0 top
LOGO48  SFE_LOGO_FLAME.2_INCH  [SFE_LOGO_FLAME_.2]  213.23,34.04 0 bottom
LOGO49  OSHW-LOGOS  [OSHW-LOGO-S]  9.4,77.72 0 bottom
LOGO50  SFE_LOGO_FLAME.2_INCH  [SFE_LOGO_FLAME_.2]  27.81,59.94 0 top
LOGO51  SFE_LOGO_FLAME.2_INCH  [SFE_LOGO_FLAME_.2]  31.88,59.94 0 bottom